# Altium PCB Copy of Power_meter.PCBDOC
Units mm, origin at the board's own origin, x right, y up, seen from the top; angles counter-clockwise.
Board outline 11.45 x 73.05 mm, 2 copper layers (Top, Bot), stack 1.571 mm thick; 56 components, 55 nets, 201 pads, 35 vias.
Unrouted connection lines stored in the file: 55.
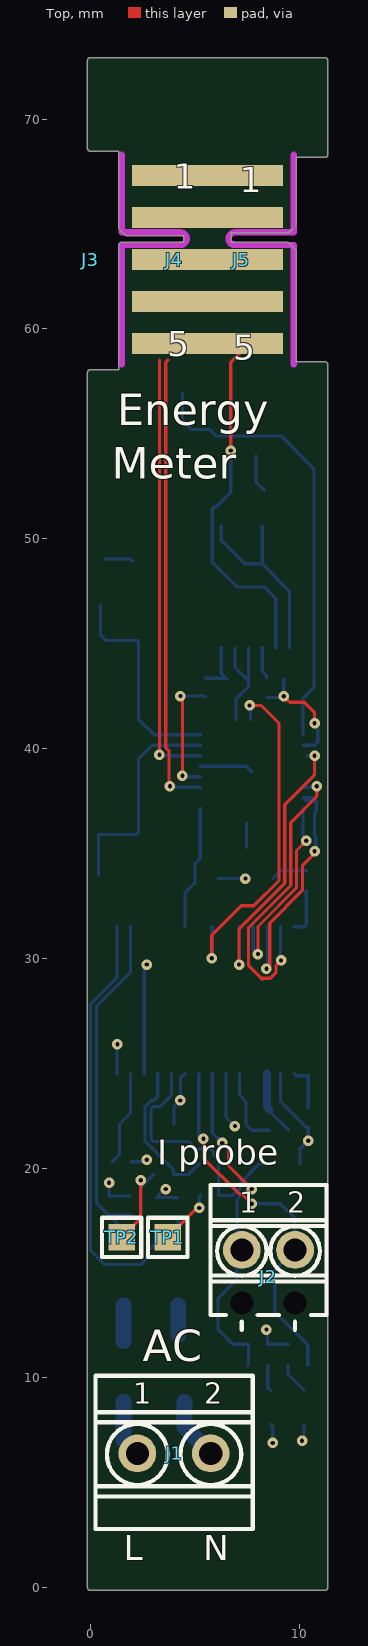
[diagram p0: Top view]
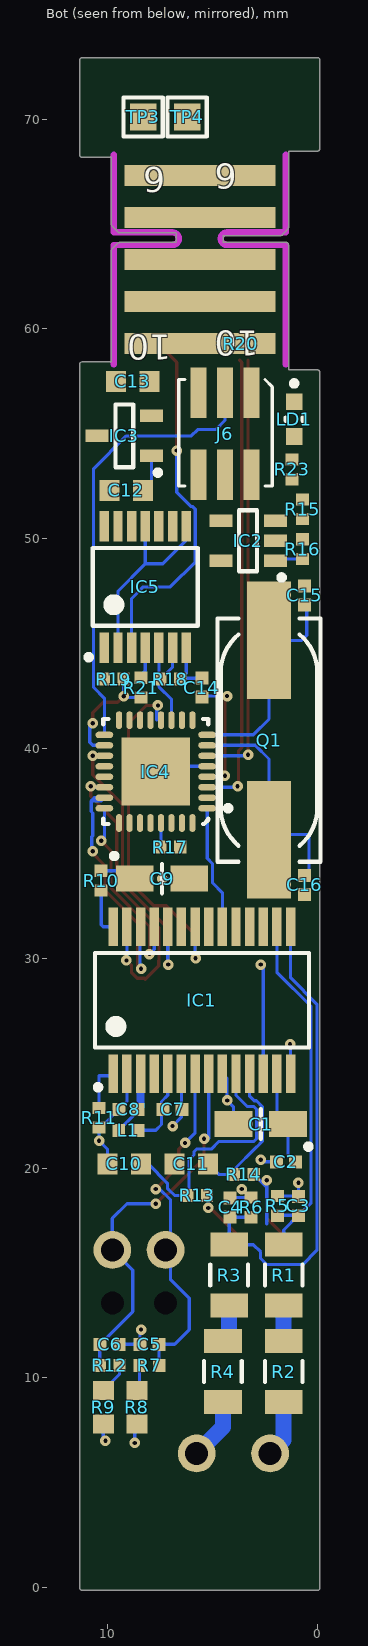
[diagram p1: Bot view, seen from below]

## Layer stack, top to bottom
TopSolder: solder mask 0.0102, Solder Resist, Dk 3.5
Top: signal copper 0.0356
Dielectric1: core 1.5, FR-4, Dk 4.8
Bot: signal copper 0.0356
BottomSolder: solder mask 0.0102, Solder Resist, Dk 3.5

## Board outline
-0.127,0 -0.127,57.917 cw(c0,57.917) 0,58.044 1.373,58.044 1.373,64 cw(c1.5,64) 1.5,64.127 4.473,64.127 4.473,64.445 1.747,64.445 cw(c1.747,64.573) 1.657,64.483 1.41,64.73 1.41,64.729 cw(c1.5,64.82) 1.373,64.82 1.373,68.473 0,68.473 cw(c0,68.6) -0.127,68.6 -0.127,72.8 cw(c0,72.8) 0,72.927 11.2,72.927 cw(c11.2,72.8) 11.327,72.8 11.327,68.3 cw(c11.2,68.3) 11.2,68.173 9.827,68.173 9.827,65 cw(c9.7,65) 9.79,64.909 9.79,64.91 9.49,64.61 9.491,64.61 cw(c9.4,64.7) 9.4,64.573 6.727,64.573 6.727,64.127 9.4,64.127 cw(c9.4,64) 9.491,64.09 9.49,64.09 9.691,63.89 ccw(c9.6,63.8) 9.69,63.89 ccw(c9.6,63.8) 9.69,63.891 9.691,63.89 9.79,63.79 9.79,63.791 cw(c9.7,63.7) 9.827,63.7 9.827,58.427 11.2,58.427 cw(c11.2,58.3) 11.327,58.3 11.327,0 cw(c11.2,0) 11.2,-0.127 0,-0.127 cw(c0,0)

## Design rules (kind name [scope] priority, off if disabled: settings)
Clearance Clearance_DIFF [(InDifferentialPairClass('All Differential Pairs'))] p1: gap=0.127 ignorepadtopadclearanceinfootprint=FALSE except(0: Arc-Hole Track-Hole SMDPad-Hole THPad-Hole Via-Hole Fill-Hole Poly-Hole Region-Hole Text-Hole; 0.254: Arc-Poly Track-Poly SMDPad-Poly THPad-Poly Via-Poly Fill-Poly Poly-Poly Poly-Region Poly-Text)
Clearance [All] p2: gap=0.127 ignorepadtopadclearanceinfootprint=FALSE except(0: Arc-Hole Track-Hole SMDPad-Hole THPad-Hole Via-Hole Fill-Hole Poly-Hole Region-Hole Text-Hole; 0.381: Arc-Poly Track-Poly SMDPad-Poly THPad-Poly Via-Poly Fill-Poly Poly-Poly)
DiffPairsRouting [All] p1: maxlimit=0.254 minlimit=0.127 mostfreqgap=0.127 toplayer_minwidth=0.127 toplayer_maxwidth=0.381 toplayer_prefwidth=0.254 bottomlayer_minwidth=0.127 bottomlayer_maxwidth=0.381 bottomlayer_prefwidth=0.254 maxuncoupledlength=12.7
FabricationTestPointUsage TestPointUsage [All] p1: valid=0 allowmultiple=FALSE
FabricationTestpoint Testpoint [All] p1: side=3 testpointundercomponent=TRUE minsize=1.016 maxsize=2.54 preferedsize=1.524 minholesize=0.508 maxholesize=1.016 preferedholesize=0.813 testpointgrid=0.025 allowsidetop=TRUE allowsidebottom=TRUE usegrid=TRUE gridtolerance=0
HoleSize [All] p1: absolutevalues=TRUE maxlimit=3.81 minlimit=0.025 maxpercent=80.000 minpercent=20.000
HoleToHoleClearance [All] p1: gap=0.025 allowstackedmicrovias=TRUE
MinimumSolderMaskSliver [All] p1: minsoldermaskwidth=0
PlaneClearance [All] p1: clearance=0.254
PlaneConnect [All] p1: planeconnectstyle=Direct reliefexpansion=0.508 reliefentries=4 reliefconductorwidth=0.254 reliefairgap=0.254
PolygonConnect PolygonConnect_pad [(InPadClass('All Pads'))] p1: connectstyle=Relief reliefconductorwidth=0.254 reliefentries=4 polygonreliefangle="90 Angle" airgapwidth=0.254
PolygonConnect [All] p2: connectstyle=Direct reliefconductorwidth=0.254 reliefentries=4 polygonreliefangle="45 Angle" airgapwidth=0.254
RoomDefinition Power_meter [InComponentClass('Power_meter')] p1 off: confinementstyle=ConfineIn formatcopy=TRUE lockcomponents=FALSE outline 20.15,26.65 202.899,26.65 202.899,50.4 20.15,50.4
RoutingVias [All] p1: holewidth=0.2 width=0.5 viastyle="Through Hole" minholewidth=0.2 minwidth=0.5 maxholewidth=0.711 maxwidth=1.27
SilkToSilkClearance [All] p1: silktosilkclearance=0
SilkToSolderMaskClearance SilkscreenOverComponentPads [IsPad] p1: minsilkscreentomaskgap=0 clearancetoexposedcopper=TRUE
SolderMaskExpansion [All] p1: expansion=0.051
Width [All] p1: maxlimit=1.27 minlimit=0.127 preferedwidth=0.127
20 further rules are at their usual default settings.

## Classes and differential pairs
component class Power_meter: C1 C2 C3 C4 C5 C6 C7 C8 C9 C10 C11 C14 C15 C16 IC1 IC2 IC3 IC5 IC8 IC9 IC10 IC11 J1 J2 J3 J4 J5 J6 L1 Q1 R1 R2 R3 R4 R5 R6 R7 R8 R9 R10 R11 R12 R13 R14 R18 R19 R20 R21 R24 TP1 TP2 TP3 TP4

## Components (designator, comment, footprint, x,y, rotation, side; value= is the part's Value field where it differs from the comment)
C1 "10uF" CAPMP3216X180N 2.7,22.1 r0 bottom
C2 "100nF" CAPC1005X55N 1.5,20.3 r180 bottom
C3 "33nF" CAPC1005X55N 0.9,18.2 r270 bottom
C4 "33nF" CAPC1005X55N 4.16,18.126 r270 bottom
C5 "33nF" CAPC1005X55N 8,11.6 r180 bottom
C6 "33nF" CAPC1005X55N 9.9,11.6 r180 bottom
C7 "100nF" CAPC1005X55N 6.9,22.8 r0 bottom
C8 "100nF" CAPC1005X55N 9,22.8 r0 bottom
C9 "10uF" CAPMP3216X180N 7.4,33.8 r180 bottom
C10 "330nF" CAPC1608X87N 9.2,20.2 r180 bottom
C11 "330nF" CAPC1608X87N 6,20.2 r0 bottom
C12 "1uF" CAPC1608X87N 9.1,52.3 r180 bottom
C13 "1uF" CAPC1608X87N 8.8,57.5 r180 bottom
C14 "100nF" CAPC1005X55N 5.5,42.9 r270 bottom
C15 "18pF" CAPC1005X55N 0.6,47.3 r270 bottom
C16 "18pF" CAPC1005X55N 0.6,33.5 r90 bottom
IC1 "ATM90E26-YU" SOP65P780X200-28N 5.5,28 r90 bottom
IC2 "24AA16T-I/OT" SOT95P280X145-5N 3.3,49.9 r0 bottom
IC3 "AP7313-33SAG-7" SOT95P285X140-3N 9.2,54.9 r0 bottom
IC4 "ATMEGA328PB-MU" QFN50P500X500X100-33N-S325 7.7,38.9 r0 bottom
IC5 "74HC4066PW" SOP65P640X110-14N 8.2,47.7 r90 bottom
J1 "=Family" PHOENIX_1751248 4,6.4 r0 top
J2 "=Family" PHOENIX_1725656 8.5,16.1 r0 top
J3 "=Family" "AVX_00 9159 010 061 916" 0,63.3 r180 top
J4 "=Family" EDGE10T1B6_P200W1000L0F100X400 4,67.3 r270 top locked
J5 "=Family" EDGE10T5B10_P200W1000L0F100X400 7.2,59.3 r90 top
J6 "ZL322-2X3P or PLHTD6S-TR-CV" ZL322-2X3P 4.4,55 r0 bottom
L1 "220R@100MHz" INDC1005X55N 9,21.8 r180 bottom
LD1 "Green" LED_KINGBRIGHT_KPH-1608CGCK 1.1,55.7 r270 bottom
Q1 "8.192MHz" XTAL_ABRACON_ABLS 2.3,40.4 r270 bottom
R1 "470k" RESC3216X65N 1.6,14.9 r270 bottom
R2 "470k" RESC3216X65N 1.6,10.3 r270 bottom
R3 "470k" RESC3216X65N 4.2,14.9 r270 bottom
R4 "470k" RESC3216X65N 4.5,10.3 r270 bottom
R5 "1k" RESC1005X40N 1.9,18.2 r270 bottom
R6 "1k" RESC1005X40N 3.16,18.126 r270 bottom
R7 "1k" RESC1005X40N 8,10.6 r0 bottom
R8 "2R4" RESC1608X55N 8.6,8.6 r90 bottom
R9 "2R4" RESC1608X55N 10.2,8.6 r270 bottom
R10 "0" RESC1005X40N 10.3,33.7 r90 bottom
R11 "0" RESC1005X40N 10.4,22.4 r270 bottom
R12 "1k" RESC1005X40N 9.9,10.6 r180 bottom
R13 "100" RESC1005X40N 5.73,18.7 r0 bottom
R14 "100" RESC1005X40N 3.5,19.7 r0 bottom
R15 "1k" RESC1005X40N 0.7,51.4 r270 bottom
R16 "1k" RESC1005X40N 0.7,49.5 r90 bottom
R17 "10k" RESC1005X40N 7,35.3 r0 bottom
R18 "100k" RESC1005X40N 7,43.3 r0 bottom
R19 "100k" RESC1005X40N 9.7,43.3 r0 bottom
R20 "100k" RESC1005X40N 3.65,59.3 r0 bottom
R21 "100k" RESC1005X40N 8.4,42.9 r90 bottom
R23 "10k" RESC1005X40N 1.2,53.3 r90 bottom
TP1 "Test Point" TPS127 3.7,16.7 r0 top
TP2 "Test Point" TPS127 1.5,16.7 r0 top
TP3 "Test Point" TPS127 8.3,70.1 r270 bottom
TP4 "Test Point" TPS127 6.2,70.1 r270 bottom

## Footprints (in the part's own frame and the unit in brackets; to place one, negate y for a bottom-side part, rotate by r counter-clockwise, add the part's x,y. Pads: shape width x height; smd on the part's side, far side on the other; paste and mask are expansions set on the pad)
"AVX_00 9159 010 061 916" [mm] "10 Contacts, 2mm Pitch, Open Ended Card Edge Connector, 9159 Series"
  body extent -5,-4.95 5,4.95, height 1.7
CAPC1005X55N [mm] "Chip Capacitor, Body 1.0x0.55mm, IPC Medium Density"
  rect 0.62x0.62 smd: 1(-0.45,0) 2(0.45,0)
  body extent -0.52,-0.27 0.53,0.28, height 0.55
CAPC1608X87N [mm] "Chip Capacitor, Body 1.6x0.8mm IPC Medium Density"
  rect 0.95x1 smd: 1(-0.8,0) 2(0.8,0)
  body extent -0.87,-0.47 0.88,0.48, height 0.87
CAPMP3216X180N [mm] "Capacitor, Polarized, Molded  Body 3.2x1.6mm, IPC Medium Density"
  rect 1.8x1.25 smd: 1(-1.3,0) 2(1.3,0)
  silkscreen extent -2.4,-0.7 0,1.2, body extent -1.7,-0.9 1.7,0.9, height 1.6
EDGE10T1B6_P200W1000L0F100X400 [mm] "10 contacts Board Edge Connector, First Left Top Pad 1, First Left Bottom Pad 2, Pitch 2mm, Length 0mm, Width 10mm, Finger Lenght 4mm, Finger Width 1mm"
  rect 1x4 smd paste-0.5: 1(0,0) 2(2,0) 3(4,0) 4(6,0) 5(8,0)
  rect 1x4 smd far side paste-0.5: 6(0,0) 7(2,0) 8(4,0) 9(6,0) 10(8,0)
  KeepOutLayer lines w0.3: 9,-2.5 3.3,-2.5 3.3,0.3 ccw(c3,0.3) 2.7,0.3 2.7,-2.5 -1,-2.5
EDGE10T5B10_P200W1000L0F100X400 [mm] "10 contacts Board Edge Connector, First Left Top Pad 5, First Left Bottom Pad 10, Pitch 2mm, Length 0mm, Width 10mm, Finger Lenght 4mm, Finger Width 1mm"
  rect 1x4 smd paste-0.5: 1(8,0) 2(6,0) 3(4,0) 4(2,0) 5(0,0)
  rect 1x4 smd far side paste-0.5: 6(8,0) 7(6,0) 8(4,0) 9(2,0) 10(0,0)
  KeepOutLayer lines w0.3: -1,-2.5 4.7,-2.5 4.7,0.3 cw(c5,0.3) 5.3,0.3 5.3,-2.5 9,-2.5
INDC1005X55N [mm] "Chip Inductor, 2-Leads, EIA 0402, Metric 1005, Body 1x0.5mm, 0402IPC Medium Density"
  rect 0.6x0.62 smd: 1(-0.46,0) 2(0.46,0)
  body extent -0.52,-0.27 0.53,0.28, height 0.55
LED_KINGBRIGHT_KPH-1608CGCK [mm] "SMT Green LED, Case 0603, Body L 1.6 x W 0.8mm H 0.65mm"
  rect 0.8x0.8 smd: 1(-0.825,0) 2(0.825,0)
  silkscreen extent -1.82,-0.4 0.08,0.4, body extent -0.8,-0.4 0.8,0.4, height 0.65
PHOENIX_1725656 [mm] "Micro PCB Terminal Block, Pitch 2.54mm, 2 Positions, Screw Connection"
  round 1.8 hole 1.1: 1(-1.27,0) 2(1.27,0)
  round 0.5 hole 1.1 unplated mask+0.3: 3(-1.27,-2.54) 4(1.27,-2.54)
  silkscreen extent -2.77,-3.81 2.77,3.1, body extent -2.77,-3.1 2.77,3.1, height 8.5
PHOENIX_1751248 [mm] "Terminal Block, 10A 160V, Pitch 3.5mm, 2 Positions, Screw Connection"
  round 1.8 hole 1.1: 1(-1.75,0) 2(1.75,0)
  silkscreen extent -3.75,-3.6 3.75,3.7, body extent -3.75,-3.6 3.75,3.7, height 8.5
QFN50P500X500X100-33N-S325 [mm] "QFN, (MO-220-VHHD-4) 0.50mm pitch,square; 8 pin X 8 pin, 5mm X 5mm X 1.00mm H body (w/thermal tab 3.25 X 3.25mm),  IPC Medium Density"
  oval 0.85x0.3 smd: 1(-2.45,1.75) 2(-2.45,1.25) 3(-2.45,0.75) 4(-2.45,0.25) 5(-2.45,-0.25) 6(-2.45,-0.75) 7(-2.45,-1.25) 8(-2.45,-1.75) 17(2.45,-1.75) 18(2.45,-1.25) 19(2.45,-0.75) 20(2.45,-0.25) 21(2.45,0.25) 22(2.45,0.75) 23(2.45,1.25) 24(2.45,1.75)
  oval 0.3x0.85 smd: 9(-1.75,-2.45) 10(-1.25,-2.45) 11(-0.75,-2.45) 12(-0.25,-2.45) 13(0.25,-2.45) 14(0.75,-2.45) 15(1.25,-2.45) 16(1.75,-2.45) 25(1.75,2.45) 26(1.25,2.45) 27(0.75,2.45) 28(0.25,2.45) 29(-0.25,2.45) 30(-0.75,2.45) 31(-1.25,2.45) 32(-1.75,2.45)
  rect 3.25x3.25 smd: 33(0,0)
  silkscreen extent -3.57,-2.5 2.5,2.5, body extent -2.5,-2.5 2.5,2.5, height 1
RESC1005X40N [mm] "Chip Resistor, EIA 0402, Metric 1005, Body 1.0x0.5mm, IPC Medium Density"
  rect 0.58x0.62 smd: 1(-0.47,0) 2(0.47,0)
  body extent -0.52,-0.27 0.53,0.28, height 0.4
RESC1608X55N [mm] "Chip Resistor, EIA 0603, Metric 1608, Body 1.6x0.8mm, IPC Medium Density"
  rect 0.9x1 smd: 1(-0.8,0) 2(0.8,0)
  body extent -0.87,-0.47 0.88,0.48, height 0.55
RESC3216X65N [mm] "Chip Resistor, EIA 1206, Metric 3216, Body 3.2x1.6mm, IPC Medium Density"
  rect 1.15x1.8 smd: 1(-1.45,0) 2(1.45,0)
  silkscreen extent -0.5,-0.9 0.5,0.9, body extent -1.67,-0.87 1.68,0.88, height 0.65
SOP65P640X110-14N [mm] "SOP, 14-Leads, Body 4.4x5mm (max), Pitch 0.65mm, IPC Medium Density"
  rect 1.45x0.45 smd: 1(-2.9,1.95) 2(-2.9,1.3) 3(-2.9,0.65) 4(-2.9,0) 5(-2.9,-0.65) 6(-2.9,-1.3) 7(-2.9,-1.95) 8(2.9,-1.95) 9(2.9,-1.3) 10(2.9,-0.65) 11(2.9,0) 12(2.9,0.65) 13(2.9,1.3) 14(2.9,1.95)
  silkscreen extent -3.47,-2.5 1.85,2.83, body extent -3.12,-2.55 3.12,2.55, height 1.1
SOP65P780X200-28N [mm] "SOP, 0.65mm Pitch; 28 Pin, 5.30mm W X 10.20mm L X 2.00mm H Body, IPC Medium Density"
  rect 1.85x0.45 smd: 1(-3.5,4.225) 2(-3.5,3.575) 3(-3.5,2.925) 4(-3.5,2.275) 5(-3.5,1.625) 6(-3.5,0.975) 7(-3.5,0.325) 8(-3.5,-0.325) 9(-3.5,-0.975) 10(-3.5,-1.625) 11(-3.5,-2.275) 12(-3.5,-2.925) 13(-3.5,-3.575) 14(-3.5,-4.225) 15(3.5,-4.225) 16(3.5,-3.575) 17(3.5,-2.925) 18(3.5,-2.275) 19(3.5,-1.625) 20(3.5,-0.975) 21(3.5,-0.325) 22(3.5,0.325) 23(3.5,0.975) 24(3.5,1.625) 25(3.5,2.275) 26(3.5,2.925) 27(3.5,3.575) 28(3.5,4.225)
  silkscreen extent -4.27,-5.1 2.25,5.1, body extent -4.11,-5.25 4.11,5.25, height 2
SOT95P280X145-5N [mm] "SOT, 0.95mm pitch; 5 pin, 1.60mm W X 2.90mm L X 1.45mm H body, IPC Medium Density"
  rect 1.1x0.6 smd: 1(-1.3,0.95) 2(-1.3,0) 3(-1.3,-0.95) 4(1.3,-0.95) 5(1.3,0.95)
  silkscreen extent -1.72,-1.45 0.43,1.87, body extent -1.4,-1.5 1.4,1.5, height 1.45
SOT95P285X140-3N [mm] "SOT23, 0.95mm Pitch; 3 Pin, 1.6mm W X 3mm L X 1.4mm H Body, IPC Medium Density"
  rect 1.1x0.6 smd: 1(-1.3,0.95) 2(-1.3,-0.95) 3(1.3,0)
  silkscreen extent -1.72,-1.5 0.43,1.87, body extent -1.4,-1.5 1.4,1.5, height 1.4
TPS127 [mm] "1.27 x  1.27mm SMD Test Point Area"
  rect 1.27x1.27 smd paste-1.27: 1(0,0)
  silkscreen extent -0.94,-0.94 0.94,0.94
XTAL_ABRACON_ABLS [mm] "HC/49US (AT49) SMD Cristal, Body 11.4x4.7mm, ABLS Serie"
  rect 5.6x2.1 smd: 1(-4.75,0) 2(4.75,0)
  silkscreen extent -5.8,-2.45 5.8,2.45, body extent -6.6,-2.45 6.6,2.45, height 4.2
ZL322-2X3P [mm] "SMT 1.27 mm dual goldpin"
  rect 0.76x2.4 smd: 1(-1.27,-1.95) 2(-1.27,1.95) 3(0,-1.95) 4(0,1.95) 5(1.27,-1.95) 6(1.27,1.95)
  silkscreen extent -2.25,-2.58 2.2,2.5, body extent -2.05,-2.15 2.03,2.15, height 4.5

## Part data
C1 C9: library part CTE3216-18_10UF_16V_20%_AVX_TCJ, "Polarised capacitor", Case=A, Manufacturer=AVX, Manufacturer Part Number=TCJA106M016R0200, Tolerance=±20%, Voltage=16V, Author="CERN DEM JLC", ComponentHeight=1.8mm, Component Type=Standard, CreateDate=29.03.2012, HelpURL=\\cern.ch\dfs\Applications\Altium\Datasheets\CTE_AVX_TCJ.pdf, LatestRevisionDate=29.03.2012, Mounted=Yes, Part Description="ESR 0R200 Tantalum Solid Electrolytic Chip Capacitor with Conductive Polymer Electrode", Part Number=CTE3216-18_10UF_16V_20%_AVX_TCJ, Pin Count=2, Sense=No, SMD=Yes, Socket=No, Status=Preferred
C2 C7 C8 C14: library part CC0402_100NF_16V_10%_X5R, "Non-polarised capacitor", Case=0402, Manufacturer=GENERIC, Manufacturer1 ComponentHeight=0.55mm, Manufacturer1 Example=MURATA, Manufacturer1 Part Number=GRM155R61C104KA88D, Tolerance=±10%, Voltage=16V, Author="CERN DEM JLC", Component Type=Standard, CreateDate=10.12.2013, HelpURL=\\cern.ch\dfs\Applications\Altium\Datasheets\CC0402_X5R_MURATA_GRM.pdf, LatestRevisionDate=10.12.2013, Manufacturer Part Number=CC0402_100NF_16V_10%_X5R, Mounted=Yes, Part Description="SMD Multilayer Chip Ceramic Capacitor", Part Number=CC0402_100NF_16V_10%_X5R, Pin Count=2, Sense=No, SMD=Yes, Socket=No, Status=None, TC=X5R
C3 C4 C5 C6: library part CC0402_33NF_16V_10%_X7R, "Non-polarised capacitor", Case=0402, Manufacturer=GENERIC, Manufacturer1 ComponentHeight=0.55mm, Manufacturer1 Example=PHYCOMP, Manufacturer1 Part Number=223878715643, Tolerance=±10%, Voltage=16V, Author="CERN DEM JLC", Component Type=Standard, CreateDate=03.12.2007, HelpURL=\\cern.ch\dfs\Applications\Altium\Datasheets\CC0402_X7R_PHYCOMP.pdf, LatestRevisionDate=03.12.2007, Manufacturer Part Number=CC0402_33NF_16V_10%_X7R, Mounted=Yes, Part Description="SMD Multilayer Chip Ceramic Capacitor", Part Number=CC0402_33NF_16V_10%_X7R, Pin Count=2, Sense=No, SMD=Yes, Socket=No, Status="Not Recommended", TC=X7R
C10 C11: library part CC0603_330NF_16V_10%_X5R, "Non-polarised capacitor", Case=0603, Manufacturer=GENERIC, Manufacturer1 ComponentHeight=0.87mm, Manufacturer1 Example=PHYCOMP, Manufacturer1 Part Number=223878613656, Tolerance=±10%, Voltage=16V, Author="CERN DEM JLC", Component Type=Standard, CreateDate=03.12.2007, HelpURL=\\cern.ch\dfs\Applications\Altium\Datasheets\CC0805_X5R_PHYCOMP_HC.pdf, LatestRevisionDate=03.12.2007, Manufacturer Part Number=CC0603_330NF_16V_10%_X5R, Mounted=Yes, Part Description="SMD Multilayer Chip Ceramic Capacitor", Part Number=CC0603_330NF_16V_10%_X5R, Pin Count=2, Sense=No, SMD=Yes, Socket=No, Status=Preferred, TC=X5R
C12 C13: library part CC0603_1UF_16V_10%_X7R, "Non-polarised capacitor", Case=0603, Manufacturer=GENERIC, Manufacturer1 ComponentHeight=0.9mm, Manufacturer1 Example="YAGEO PHYCOMP", Manufacturer1 Part Number=223878615663, Manufacturer Part Number=CC0603_1uF_16V_10%_X7R, Tolerance=±10%, Voltage=16V, Author="CERN DEM JLC", Component Type=Standard, CreateDate=03.12.2007, HelpURL=\\cern.ch\dfs\Applications\Altium\Datasheets\CC0603_X7R_PHYCOMP.pdf, LatestRevisionDate=17.04.2015, Mounted=Yes, Part Description="SMD Multilayer Chip Ceramic Capacitor", Part Number=CC0603_1UF_16V_10%_X7R, Pin Count=2, Sense=No, SMD=Yes, Socket=No, Status=None, TC=X7R
C15 C16: library part CC0402_18PF_50V_5%_C0G, "Non-polarised capacitor", Case=0402, Manufacturer=GENERIC, Manufacturer1 ComponentHeight=0.55mm, Manufacturer1 Example=KEMET, Manufacturer1 Part Number=C0402C180J5GACTU, Tolerance=±5%, Voltage=50V, Author="CERN DEM JLC", Component Type=Standard, CreateDate=04.10.2016, HelpURL="\\cern.ch\dfs\Applications\Altium\Datasheets\CC0805_C0G_KEMET_(Commercial Grade).pdf", LatestRevisionDate=04.10.2016, Manufacturer Part Number=CC0402_18PF_50V_5%_C0G, Mounted=Yes, Part Description="SMD Multilayer Chip Ceramic Capacitor", Part Number=CC0402_18PF_50V_5%_C0G, Pin Count=2, Sense=No, SMD=Yes, Socket=No, Status=Preferred, TC=C0G/NP0
IC1: "Single-Phase High-Performance Wide-Span, Energy Metering IC", Case=SSOP28, Manufacturer="MICROCHIP TECHNOLOGY", Author="CERN DEM MR", Bonding=No, ComponentHeight=2mm, Component Type=Standard, CreateDate=13.12.2017, Device=ATM90E26-YU, HelpURL=\\cern.ch\dfs\Applications\Altium\Datasheets\ATM90E26-YU.pdf, LatestRevisionDate=13.12.2017, Manufacturer Part Number=ATM90E26-YU, Mounted=Yes, PackageDescription="SOP, 0.65mm Pitch; 28 pin, 5.30mm W X 10.20mm L X 2.00mm H body, IPC Medium Density", Part Description="Single-Phase High-Performance Wide-Span, Energy Metering IC", Part Number=ATM90E26-YU, Pin Count=28, PressFit=No, Sense=No, SMD=Yes, Socket=No
IC2: "1.7V-5.5V, 2K I2C Serial EEPROM With EUI-48 Node Identity", Case=SOT23-5, Manufacturer="MICROCHIP TECHNOLOGY", Author=GK, Bonding=No, ComponentHeight=1.45mm, Component Type=Standard, CreateDate=31.03.2016, Device=24AA16T-I/OT, HelpURL=\\cern.ch\dfs\Applications\Altium\Datasheets\24AA02E48T-I-OT.pdf, LatestRevisionDate=31.03.2016, Manufacturer Part Number=24AA16T-I/OT, Mounted=Yes, PackageDescription="SOT, 0.95mm pitch; 5 pin, 1.60mm W X 2.90mm L X 1.45mm H body, IPC Medium Density", Part Description="1.7V-5.5V, 16K I2C Serial EEPROM", Part Number=24AA16T-I/OT, Pin Count=5, PressFit=No, Sense=No, SMD=Yes, Socket=No
IC3: "150mA, Low Quiescent Current, Fast Transient Low Dropout Linear Regulator", Case=SOT23, Manufacturer="DIODES INCORPORATED", Author=GK, Bonding=No, ComponentHeight=1.45mm, Component Type=Standard, CreateDate=10.07.2015, Device=AP7313-33SAG-7, HelpURL=\\cern.ch\dfs\Applications\Altium\Datasheets\AP133-WG-7.pdf, LatestRevisionDate=10.07.2015, Manufacturer Part Number=AP7313-33SAG-7, Mounted=Yes, PackageDescription="SOT23, 0.95mm pitch; 3 pin, 1.6mm W X 3.0mm L X 1.45mm H body, IPC Medium Density", Part Description="150mA, Low Quiescent Current, Fast Transient Low Dropout Linear Regulator", Part Number=AP7313-33SAG-7, Pin Count=5, PressFit=No, Sense=No, SMD=Yes, Socket=No
IC4: "8-bit AVR 20MHz Microcontroller With 32K Bytes In-System  Programmable  Flash", Case=QFN32, Manufacturer=ATMEL, Author=GK, Bonding=No, ComponentHeight=1mm, Component Type=Standard, CreateDate=2011-02-08, Device=ATMEGA328PB-MU, HelpURL=\\cern.ch\dfs\Applications\Altium\Datasheets\ATMEGA328P-MU.pdf, LatestRevisionDate=2014-07-02, Manufacturer Part Number=ATMEGA328PB-MU, Mounted=Yes, PackageDescription="QFN, (MO-220-VHHD-2) 0.50mm pitch,square; 8 pin X 8 pin, 5mm X 5mm X 1.00mm H body (w/thermal tab 3.25 X 3.25mm),  IPC Medium Density", Part Description="8-bit AVR Microcontroller, 32KB Flash, 1KB EEPROM, 2KB SRAM, 32-pin MLF, Industrial Grade (-40°C to 85°C)", Part Number=ATMEGA328PB-MU, Pin Count=33, PressFit=No, Sense=No, SMD=Yes, Socket=No
IC5: Case=TSSOP14, Manufacturer="NXP SEMICONDUCTORS", Author="CERN DEM JLC", Bonding=No, ComponentHeight=1.1mm, Component Type=Standard, CreateDate=19.11.2014, Device=74HC4066PW, HelpURL=\\cern.ch\dfs\Applications\Altium\Datasheets\74HC4066PW.pdf, LatestRevisionDate=19.11.2014, Manufacturer Part Number=74HC4066PW, Mounted=Yes, PackageDescription="SOP, 14-Leads, Body 4.4x5mm (max), Pitch 0.65mm, IPC Medium Density", Part Description="Quad Single-Pole Single-Throw Analog Switch", Part Number=74HC4066PW, Pin Count=14, PressFit=No, Sense=No, SMD=Yes, Socket=No
J1: library part PHOENIX_1751248, "Terminal Block, 2 Positions, Screw Connection", Manufacturer="PHOENIX CONTACT", Manufacturer Part Number="1751248 (MKDS 1/ 2-3,5)", Author="CERN DEM JLC", ComponentHeight=8.5mm, Component Type=Standard, CreateDate=03.11.2009, HelpURL=\\cern.ch\dfs\Applications\Altium\Datasheets\PHOENIX_1751248.pdf, LatestRevisionDate=26.04.2010, Mounted=Yes, Part Description="10A 160V, Terminal Block, Pitch 3.5mm, 2 Positions, Screw Connection", Part Number=PHOENIX_1751248, Pin Count=2, PressFit=No, Sense=No, SMD=No, Socket=No, Status=None
J2: library part PHOENIX_1725656, "Terminal Block, 2 Positions, Screw Connection", Manufacturer="PHOENIX CONTACT", Manufacturer Part Number="1725656 (MPT 0,5/2-2,54)", Author="CERN DEM JMW", ComponentHeight=8.5mm, Component Type=Standard, CreateDate=07.11.2008, HelpURL=\\cern.ch\dfs\Applications\Altium\Datasheets\PHOENIX_1725656.pdf, LatestRevisionDate=26.04.2010, Mounted=Yes, Part Description="6A, 63V, Terminal Block, Pitch 2.54mm, 2 Positions, Screw Connection", Part Number=PHOENIX_1725656, Pin Count=2, PressFit=No, Sense=No, SMD=No, Socket=No, Status=None
J3: library part "AVX_00 9159 010 061 916", "Open Ended Card Edge Connector, 9159 Series", Manufacturer=AVX, Manufacturer Part Number="00 9159 010 061 916", Author="CERN DEM MR", ComponentHeight=1.6mm, Component Type=Standard, CreateDate=13.02.2018, HelpURL="\\cern.ch\dfs\Applications\Altium\Datasheets\AVX_00 9159 010 061 916.pdf", LatestRevisionDate=13.02.2018, Mounted=Yes, Part Description="10 Contacts, 2mm Pitch, Open Ended Card Edge Connector, 9159 Series", Part Number="AVX_00 9159 010 061 916", Pin Count=10, PressFit=No, Sense=No, SMD=No, Socket=No, Status=None
J4: library part EDGE10T1B6_P200W1000L0F100X400, "PCB Edge Connector 10 (2x5)", Author="CERN DEM MR", ComponentHeight=0mm, Component Type="Standard (No BOM)", CreateDate=14.02.2018, HelpURL=\\cern.ch\dfs\Applications\Altium\Datasheets\EDGE10T1B6_P200W1000L0F100X400.pdf, LatestRevisionDate=14.02.2018, Mounted=No, Part Description="10 Contacts Board Edge Connector, Pitch 2mm, Length 0mm, Width 10mm, Finger Lenght 4mm, Finger Width 1mm", Part Number=EDGE10T1B6_P200W1000L0F100X400, Pin Count=10, PressFit=No, Sense=No, SMD=No, Socket=No, Status=None
J5: library part EDGE10T5B10_P200W1000L0F100X400, "PCB Edge Connector 10 (2x5)", Author="CERN DEM MR", ComponentHeight=0mm, Component Type="Standard (No BOM)", CreateDate=14.02.2018, HelpURL=\\cern.ch\dfs\Applications\Altium\Datasheets\EDGE10T5B10_P200W1000L0F100X400.pdf, LatestRevisionDate=14.02.2018, Mounted=No, Part Description="10 Contacts Board Edge Connector, Pitch 2mm, Length 0mm, Width 10mm, Finger Lenght 4mm, Finger Width 1mm", Part Number=EDGE10T5B10_P200W1000L0F100X400, Pin Count=10, PressFit=No, Sense=No, SMD=No, Socket=No, Status=None
J6: library part "CON_2x3 1.27 SMT Male", "1.27 mm dual row goldpin (Maritex)"
L1: library part IND0402_MURATA_BLM15HB221SN1, "Inductor", Case=0402, Manufacturer=MURATA, Manufacturer Part Number=BLM15HB221SN1, Power=250mA, Resistance=1R, Tolerance=±25%, Author="CERN DEM JLC", ComponentHeight=0.55mm, Component Type=Standard, CreateDate=23.06.2009, HelpURL=\\cern.ch\dfs\Applications\Altium\Datasheets\IND0402_MURATA_BLM15H.pdf, LatestRevisionDate=23.06.2009, Mounted=Yes, Part Description="SMD EMIFIL Suppression Chip Ferrite Bead", Part Number=IND0402_MURATA_BLM15HB221SN1, Pin Count=2, Sense=No, SMD=Yes, Socket=No, Status=None
LD1: library part LED_KINGBRIGHT_KPH-1608CGCK, "LED Green 1C 2A", Manufacturer=KINGBRIGHT, Manufacturer Part Number=KPH-1608CGCK, Author="CERN DEM JLC", Bonding=No, Color=Green, ComponentHeight=0.65mm, Component Type=Standard, CreateDate=03.07.2017, HelpURL=\\cern.ch\dfs\Applications\Altium\Datasheets\LED_KINGBRIGHT_KPH-1608CGCK.pdf, LatestRevisionDate=03.07.2017, Mounted=Yes, PackageDescription="SMT Green LED, Case 0603, Body L 1.6 x W 0.8mm H 0.65mm", Part Description="SMD Green LED, Case 1.6mmX0.8mm(0603), 0.65mm Thickness", Part Number=LED_KINGBRIGHT_KPH-1608CGCK, Pin Count=2, PressFit=No, Sense=No, SMD=Yes, Socket=No
Q1: library part XTAL_8.192MHZ_ABRACON_ABLS-8.192MHZ-B2-T, "Quartz Crystal", Manufacturer=ABRACON, Manufacturer Part Number=ABLS-8.192MHZ-B2-T, Author="CERN DEM MR", Bonding=No, ComponentHeight=4.2mm, Component Type=Standard, CreateDate=15.02.2018, HelpURL=\\cern.ch\dfs\Applications\Altium\Datasheets\XTAL_ABRACON_ABLS.pdf, LatestRevisionDate=15.02.2018, Mounted=Yes, PackageDescription="SMD Crystal, Body 11.40mm L X 4.70mm W X 4.20mm H, HC/49US (AT49) ALBS Series", Part Description="Tolerance: ± 20ppm, Stability: ± 50ppm, -20°C to +70°C, 18pF, 80 Ohms ESR, Low Profile Surface Mount Microprocessor Crystal, ABLS Series", Part Number=XTAL_8.192MHZ_ABRACON_ABLS-8.192MHZ-B2-T, Pin Count=2, PressFit=No, Sense=No, SMD=Yes, Socket=No
R1 R2 R3 R4: library part R1206_470K_1%_0.25W_100PPM, "Resistor - 1%", Case=1206, Manufacturer=GENERIC, Manufacturer1 ComponentHeight=0.65mm, Manufacturer1 Example="NIC COMPONENT", Manufacturer1 Part Number=NRC12F4703TRF, Power=0.25W, Tolerance=±1%, Author="CERN DEM JLC", Component Type=Standard, CreateDate=03.12.2007, HelpURL=\\cern.ch\dfs\Applications\Altium\Datasheets\R1206_NIC_NRC.pdf, LatestRevisionDate=13.03.2008, Manufacturer Part Number=R1206_470K_1%_0.25W_100PPM, Mounted=Yes, Part Description="General Purpose Thick Film Chip Resistor", Part Number=R1206_470K_1%_0.25W_100PPM, Pin Count=2, PressFit=No, Sense=No, SMD=Yes, Socket=No, Status=Preferred, TC=±100ppm/°C
R5 R6 R7 R12 R15 R16: library part R0402_1K_1%_0.0625W_100PPM, "Resistor - 1%", Case=0402, Manufacturer=GENERIC, Manufacturer1 ComponentHeight=0.4mm, Manufacturer1 Example="YAGEO PHYCOMP", Manufacturer1 Part Number=232270671002L, Power=0.0625W, Tolerance=±1%, Author="CERN DEM JLC", Component Type=Standard, CreateDate=03.12.2007, HelpURL=\\cern.ch\dfs\Applications\Altium\Datasheets\R0402_Phycomp_RC0402.pdf, LatestRevisionDate=17.10.2012, Manufacturer Part Number=R0402_1K_1%_0.0625W_100PPM, Mounted=Yes, Part Description="General Purpose Thick Film Chip Resistor", Part Number=R0402_1K_1%_0.0625W_100PPM, Pin Count=2, PressFit=No, Sense=No, SMD=Yes, Socket=No, Status="Not Recommended", TC=±100ppm/°C
R8 R9: library part R0603_2R4_1%_0.1W_200PPM, "Resistor - 1%", Case=0603, Manufacturer=GENERIC, Manufacturer1 ComponentHeight=0.65mm, Manufacturer1 Example="YAGEO PHYCOMP", Manufacturer1 Part Number="232270462408L or RC0603FR-072R4L", Power=0.1W, Tolerance=±1%, Author="CERN DEM JLC", Component Type=Standard, CreateDate=03.12.2007, HelpURL=\\cern.ch\dfs\Applications\Altium\Datasheets\R0603_Tyco_RN73.pdf, LatestRevisionDate=17.10.2012, Manufacturer Part Number=R0603_2R4_1%_0.1W_200PPM, Mounted=Yes, Part Description="General Purpose Thick Film Chip Resistor", Part Number=R0603_2R4_1%_0.1W_200PPM, Pin Count=2, PressFit=No, Sense=No, SMD=Yes, Socket=No, Status=Preferred, TC=±200ppm/°C
R10 R11: library part R0402_0R_JUMPER, "Resistor", Case=0402, Manufacturer=GENERIC, Manufacturer1 ComponentHeight=0.4mm, Manufacturer1 Example="YAGEO PHYCOMP", Manufacturer1 Part Number=232270591001L, Author="CERN DEM JLC", Component Type=Standard, CreateDate=03.12.2007, HelpURL=\\cern.ch\dfs\Applications\Altium\Datasheets\R0402_Phycomp_RC0402.pdf, LatestRevisionDate=17.10.2012, Manufacturer Part Number=R0402_0R_JUMPER, Mounted=Yes, Part Description="1A (0.05R Max DC Resistance) Zero Ohm Jumper", Part Number=R0402_0R_JUMPER, Pin Count=2, PressFit=No, Sense=No, SMD=Yes, Socket=No, Status="Not Recommended"
R13 R14: library part R0402_100R_1%_0.0625W_100PPM, "Resistor - 1%", Case=0402, Manufacturer=GENERIC, Manufacturer1 ComponentHeight=0.4mm, Manufacturer1 Example="YAGEO PHYCOMP", Manufacturer1 Part Number=232270671001L, Power=0.0625W, Tolerance=±1%, Author="CERN DEM JLC", Component Type=Standard, CreateDate=03.12.2007, HelpURL=\\cern.ch\dfs\Applications\Altium\Datasheets\R0402_Phycomp_RC0402.pdf, LatestRevisionDate=17.10.2012, Manufacturer Part Number=R0402_100R_1%_0.0625W_100PPM, Mounted=Yes, Part Description="General Purpose Thick Film Chip Resistor", Part Number=R0402_100R_1%_0.0625W_100PPM, Pin Count=2, PressFit=No, Sense=No, SMD=Yes, Socket=No, Status="Not Recommended", TC=±100ppm/°C
R17 R23: library part R0402_10K_1%_0.0625W_100PPM, "Resistor - 1%", Case=0402, Manufacturer=GENERIC, Manufacturer1 ComponentHeight=0.4mm, Manufacturer1 Example="YAGEO PHYCOMP", Manufacturer1 Part Number=232270671003L, Power=0.0625W, Tolerance=±1%, Author="CERN DEM JLC", Component Type=Standard, CreateDate=03.12.2007, HelpURL=\\cern.ch\dfs\Applications\Altium\Datasheets\R0402_Phycomp_RC0402.pdf, LatestRevisionDate=17.10.2012, Manufacturer Part Number=R0402_10K_1%_0.0625W_100PPM, Mounted=Yes, Part Description="General Purpose Thick Film Chip Resistor", Part Number=R0402_10K_1%_0.0625W_100PPM, Pin Count=2, PressFit=No, Sense=No, SMD=Yes, Socket=No, Status="Not Recommended", TC=±100ppm/°C
R18 R19 R20 R21: library part R0402_100K_1%_0.0625W_100PPM, "Resistor - 1%", Case=0402, Manufacturer=GENERIC, Manufacturer1 ComponentHeight=0.4mm, Manufacturer1 Example="YAGEO PHYCOMP", Manufacturer1 Part Number=232270671004L, Power=0.0625W, Tolerance=±1%, Author="CERN DEM JLC", Component Type=Standard, CreateDate=03.12.2007, HelpURL=\\cern.ch\dfs\Applications\Altium\Datasheets\R0402_Phycomp_RC0402.pdf, LatestRevisionDate=17.10.2012, Manufacturer Part Number=R0402_100K_1%_0.0625W_100PPM, Mounted=Yes, Part Description="General Purpose Thick Film Chip Resistor", Part Number=R0402_100K_1%_0.0625W_100PPM, Pin Count=2, PressFit=No, Sense=No, SMD=Yes, Socket=No, Status="Not Recommended", TC=±100ppm/°C
TP1 TP2 TP3 TP4: library part SMD_PAD_1.27X1.27MM, Author="CERN DEM JLC", ComponentHeight=0mm, Component Type="Standard (No BOM)", CreateDate=12.01.2008, Family="Test Point", HelpURL=Undefined, LatestRevisionDate=12.01.2008, Mounted=No, PackageDescription="1.27mm x 1.27mm PCB Copper Area (SMD Test Point)", Part Description="1.27mm x 1.27mm PCB Copper Area (SMD Test Point)", Part Number=SMD_PAD_1.27X1.27MM, Pin Count=1, Sense=No, SMD=Yes, Socket=No, Status=None

## Via types
v1: diameter 0.5, hole 0.2, Top to Bot, 35 vias

## Nets (pads, with @x,y where several pads share a name; then routed paths per layer and width w, separated by ;. In a path a pad name is that pad's centre, name@x,y a point inside that pad or via, vN(x,y) a via of type N, cw(c..) or ccw(c..) an arc to the next point about the centre after c; other vN are vias at no path point)
CLK_8.192: IC1.22 IC4.12 | length 16.9
  Top w0.152: v1(5.8,30) 5.8,31.1 7.2,32.5 7.8,32.5 9,33.7 9,41.2 8.15,42.05 v1(7.6,42.05)
  Bot w0.152: v1(5.8,30) 5.825,30.025 IC1.22 ; v1(7.6,42.05) 7.65,42 7.65,41.35
CS: IC1.24 IC4.19 | length 13.6
  Top w0.152: v1(7.1,29.7) 7.1,31.405 9.279,33.584 9.279,37.32 10.7,38.741 v1(10.7,39.65)
  Bot w0.152: v1(7.1,29.7) 7.125,29.725 IC1.24 ; IC4.19@10.35,39.65 v1(10.7,39.65)
GND: C1.2 C2.1 C3.1 C4.1 C5.1 C6.2 C7.1 C8.2 C9.2 C10.1 C11.2 C12.1 C13.1 C14.1 C15.1 C16.1 IC1.2 IC1.6 IC1.9 IC1.14 IC2.2 IC2.5 IC3.3 IC4.5 IC4.21 IC4.33 IC5.7 J4.9 J5.9 J6.6 LD1.1 R5.1 R6.1 R8.1 R9.2 R11.2 R18.1 R20.1 TP4.1 | length 25.9
  Top w0.152: v1(3.6,19) 3.636,19.036 v1@3.7,19.036
  Bot w0.152: v1(0.9,19.3) C3.1 0.92,18.67 R5.1 ; IC1.14 1.275,25.875 v1(1.3,25.9) ; C2.1 2.6,20.3 v1(2.7,20.4) ; v1(3.6,19) 3.564,19 R6.1 4.14,18.596 C4.1 ; C1.2 4,22.931 v1(4.294,23.225) 4.303,23.235 4.303,24.278 IC1.9 ; IC4.5 7.45,39.15 IC4.33 ; C14.1 6.38,43.35 R18.1@6.43,43.4 ; C9.2 v1(7.4,33.8) ; IC5.7 6.25,43.58 R18.1@6.43,43.4 ; IC1.6 6.475,22.425 v1(6.9,22) ; R18.1 R18.1@6.43,43.4 ; v1(8.4,12.3) 8.45,12.25 C5.1 C6.2 ; R8.1 8.7,7.7 v1(8.7,6.9) ; IC1.2 9.075,23.175 C8.2 10.32,21.93 R11.2 v1(10.4,21.3) 10,20.9 C10.1 ; v1(10.1,7) 10.2,7.1 R9.2
I1N: C10.2 IC1.10 R13.2 | length 12.2
  Bot w0.152: IC1.10 3.875,23.475 3.328,22.928 3.016,22.928 2.897,22.809 2.897,21.391 3.016,21.272 4.687,21.272 5.056,20.903 5.759,20.903 5.878,20.784 5.878,20.622 6.122,20.378 6.122,18.7 R13.2 6.805,18.7 7.147,19.042 7.147,19.284 8.062,20.2 C10.2
I1N_IN: R13.1 TP1.1 | length 2.7
  Top w0.152: TP1.1 5.1,18.1 v1(5.2,18.1)
  Bot w0.152: v1(5.2,18.1) 5.2,18.64 R13.1
I1P: C11.1 IC1.11 R14.2 | length 7.1
  Bot w0.152: IC1.11 3.225,23.42 3.012,23.208 2.9,23.208 2.617,22.925 2.617,21.275 2.9,20.992 2.908,20.992 3.97,19.93 R14.2 4.7,19.7 C11.1
I1P_IN: R14.1 TP2.1 | length 6.1
  Top w0.152: TP2.1 2.413,17.613 v1(2.413,19.423)
  Bot w0.152: 2.413,17.343 2.413,19.083 ; v1(2.413,19.423) 2.413,19.083 ; R14.1 2.413,19.083
I2N: C6.1 IC1.8 J2.2 R12.1 | length 17.9
  Top w0.152: v1(5.4,21.4) 5.4,20.47 7.1,18.77 7.23,18.77 v1(7.7,18.3)
  Bot w0.152: IC1.8 5.175,21.425 5.2,21.4 v1(5.4,21.4) ; v1(7.7,18.3) 9.07,18.3 9.77,17.6 J2.2 8.8,15.13 8.8,13.157 10.37,11.587 R12.1
I2N_IN: R9.1 R12.2 | length 1.5
  Bot w0.152: R12.2 9.43,10.17 R9.1
I2P: C5.2 IC1.7 J2.1 R7.1 | length 16.5
  Top w0.152: v1(6.3,21.2) 6.6,20.9 6.6,20.1 v1(7.7,19)
  Bot w0.152: IC1.7 5.825,21.675 v1(6.3,21.2) ; R7.1 7.55,10.62 C5.2 6.8,11.6 6.1,12.3 6.1,13.8 7,14.7 7,18.5 7.5,19 v1(7.7,19)
I2P_IN: R7.2 R8.2 | length 1.3
  Bot w0.152: R7.2 8.47,9.53 R8.2
IO0: IC4.14 J4.8 J5.8
IO1: IC4.13 J4.10 J5.10
IRQ: IC1.20 IC4.1 | length 6
  Bot w0.152: IC1.20 4.525,33.125 4.997,33.597 4.997,34.509 5.25,34.762 IC4.1
NetC7_2: C7.2 IC1.5 L1.2 | length 3.8
  Bot w0.152: IC1.5 7.125,23.475 7.425,23.175 7.425,22.075 7.7,21.8 L1.2
NetC15_2: C15.2 IC4.8 Q1.1 | length 10.4
  Bot w0.152: C15.2@0.5,46.85 0.5,45.4 0.75,45.15 Q1.1 2.3,41.4 3.05,40.65 IC4.8
NetC16_2: C16.2 IC4.7 Q1.2 | length 10.6
  Bot w0.152: C16.2@0.4,33.95 0.4,35.9 2.2,35.9 2.3,36 2.3,39.5 2.953,40.153 5.247,40.153 IC4.7
NetC17_1: IC4.20
NetIC1_1: IC1.1 R11.1 | length 2.2
  Bot w0.152: IC1.1 9.825,24.4 10.4,24.4 R11.1
NetIC1_28: IC1.28 R10.1 | length 2.2
  Bot w0.152: IC1.28 10.2,31.5 10.3,31.6 R10.1
NetIC4_32: IC4.32 R23.1
NetIC5_2: IC5.2 IC5.8 IC5.11 J4.3 | length 9.4
  Bot w0.152: IC5.8 6.25,49.917 7.367,48.8 8.2,48.8 ; IC5.11 8.2,48.8 ; IC5.2 9.5,47.5 8.2,48.8
NetIC5_3: IC5.3 J5.5 | length 17.1
  Top w0.152: v1(6.7,54.2) 6.7,58.4 7.2,58.9 J5.5
  Bot w0.152: v1(6.7,54.2) 6.7,52.213 6.016,51.528 5.941,51.528 5.822,51.409 5.822,48.878 7,47.7 8.3,47.7 8.85,47.15 IC5.3
NetIC5_9: IC5.9 IC5.10 J5.3
NetJ1_1: J1.1 R2.2 | length 2.7
  Bot w0.762: R2.2 1.6,7.05 J1.1
NetJ1_2: J1.2 R4.2 | length 3
  Bot w0.762: R4.2 4.5,7.65 J1.2
NetJ4_7: J4.7 J5.7
NetLD1_2: LD1.2 R23.2
NetLD2_2: 
NetR1_2: R1.2 R2.1 | length 1.7
  Bot w0.762: R2.1 R1.2
NetR3_2: R3.2 R4.1 | length 1.4
  Bot w0.762: R4.1@4.2,12.05 R3.2
OUT_EN: IC4.26 IC5.13 R20.2
P3V3: C8.1 C9.1 C13.2 C14.2 IC1.3 IC2.4 IC3.2 IC4.4 IC4.18 IC5.14 J6.2 L1.1 R10.2 R15.2 R16.2 R19.1 R21.1 TP3.1 | length 16.6
  Top w0.152: v1(4.3,42.5) 4.4,42.4 v1(4.4,38.7) ; v1(9.23,42.49) 9.52,42.2 10.2,42.2 10.7,41.7 v1(10.7,41.2)
  Bot w0.152: v1(4.3,42.5) 5.45,42.5 C14.2 ; v1(4.4,38.7) 4.45,38.65 IC4.4 ; R21.1 9.17,42.43 v1(9.23,42.49) R19.1 ; C8.1 8.55,22.71 L1.1 ; C9.1 C9.1@9.07,34.17 ; C9.1@9.125,34.225 C9.1@9.07,34.17 ; IC4.18 10.703,40.15 10.85,40.297 10.85,41.05 v1(10.7,41.2) ; R10.2 C9.1@9.07,34.17
  Bot w0.381: IC1.3 8.425,22.925 C8.1
P5V0: C12.2 IC3.1 J4.1 J5.1 R17.1 | length 1.8
  Bot w0.152: IC3.1 7.9,52.7 C12.2
P12V0: J4.2 J5.2
PROG_MISO: IC4.16 J6.1
PROG_MOSI: IC4.15 J6.4
PROG_SCK: IC4.17 J6.3 | length 21.4
  Bot w0.152: J6.3 4.4,55.635 4.835,55.2 5.7,55.2 6,54.9 9.1,54.9 10.663,53.337 10.663,42.906 10.15,42.393 IC4.17
RESETn: IC1.4 IC4.29 J6.5 R17.2 | length 1.2
  Bot w0.152: IC4.29 7.45,35.32 R17.2
RxD: IC4.30 IC5.4 J4.5 R21.2 | length 1.5
  Bot w0.152: IC5.4 8.2,43.7 8.4,43.5 R21.2
SCL: IC4.6 J4.6 | length 20.8
  Top w0.152: v1(3.3,39.7) 3.3,58.5
  Bot w0.152: v1(3.3,39.7) 3.35,39.65 IC4.6
SCL1: IC2.1 IC4.28 R16.1 | length 1.3
  Bot w0.152: R16.1 1.92,49.03 IC2.1
SCL/Rx: J5.6
SCLK: IC1.25 IC4.24 | length 9.4
  Top w0.152: v1(8,30.2) 8,31.515 9.838,33.353 9.838,35.138 v1(10.3,35.6)
  Bot w0.152: IC1.25 7.775,30.425 v1(8,30.2) ; IC4.24 10.15,35.75 v1(10.3,35.6)
SDA: IC4.3 J4.4 | length 21.9
  Top w0.152: 3.7,58.5 3.6,58.4 3.6,40.041 3.753,39.888 3.753,38.247 v1(3.8,38.2)
  Bot w0.152: v1(3.8,38.2) 3.85,38.15 IC4.3
SDA1: IC2.3 IC4.27 R15.1
SDA/Tx: J5.4
SI/RX: IC1.27 IC4.22 | length 14.6
  Top w0.152: v1(9.1,29.9) 8.853,29.653 8.853,29.312 8.588,29.047 8.247,29.047 8.2,29 7.553,29.647 7.553,29.888 7.547,29.894 7.547,31.457 9.559,33.469 9.559,36.469 10.8,37.71 v1(10.8,38.2)
  Bot w0.152: IC1.27 9.075,29.925 v1(9.1,29.9) ; IC4.22 10.7,38.15 10.7,38.2 v1(10.8,38.2)
SLAVE_EN: IC4.11 IC5.5 IC5.6 IC5.12 R18.2 | length 5.4
  Bot w0.152: IC5.6 6.9,43.87 R18.2 ; IC4.11 6.95,42.35 7.55,42.95 IC5.5
SO/TX: IC1.26 IC4.23 | length 12.8
  Top w0.152: v1(8.4,29.5) 8.559,29.659 8.559,31.678 10.118,33.237 10.118,34.418 v1@10.8,35.1 ; v1(10.7,35.1) v1@10.8,35.1 ; v1@10.85,35.15 v1@10.8,35.1
  Bot w0.152: v1(8.4,29.5) 8.453,29.553 8.453,31.472 IC1.26 ; v1(10.7,35.1) 10.6,35.1 10.753,35.253 10.753,35.788 10.7,35.841 10.7,36.926 10.778,37.004 10.778,37.503 ; 10.778,37.503 10.631,37.65 IC4.23 10.297,37.503 10.778,37.503
TxD: IC4.31 IC5.1 R19.2
USEL: IC1.12 IC4.9 | length 5.3
  Bot w0.152: IC1.12 2.575,29.575 v1(2.7,29.7)
VN: C4.2 IC1.15 R3.1 R6.2 | length 23.3
  Bot w0.152: IC1.15 1.275,29.075 0.017,27.817 0.017,16.083 0.7,15.4 2.412,15.4 2.703,15.691 2.703,16.003 3.05,16.35 R3.1 4.2,17.636 C4.2 4.14,17.656 R6.2
VP: C3.2 IC1.16 R1.1 R5.2 | length 17.4
  Bot w0.152: R1.1 1.6,17.05 C3.2 ; IC1.16 1.925,29.33 0.297,27.702 0.297,18.346 0.893,17.75 C3.2 ; R5.2@1.95,17.75 C3.2
VREF: C1.1 C2.2 IC1.13 | length 4.6
  Bot w0.152: C2.2 1.4,20.65 C1.1 1.925,22.625 IC1.13
pads on no net: IC1.17 IC1.18 IC1.19 IC1.21 IC1.23 IC4.2 IC4.10 IC4.25 J2.3 J2.4

## Silkscreen, mask and mechanical layers (free items; w line width, h text height)
TopOverlay:
  text "Energy" at 1.3,55.4 h1.5
  text "Meter" at 1.035,52.85 h1.5
  text "I probe" at 3.2,20.16 h1.2
  text "AC" at 2.5,10.8 h1.5
  text "L" at 1.6,1.3 h1.2
  text "N" at 5.4,1.3 h1.2
Mechanical1:
  lines w0.254: 10.9,58.3 9.7,58.3 ; 10.9,68.3 9.7,68.3 ; 9.7,58.3 9.7,63.7 9.6,63.8 9.4,64 6.6,64 6.6,64.7 9.4,64.7 9.7,65 9.7,68.3 ; 9.7,58.3 11.2,58.3 11.2,1.5 11.2,0 0,0 0,57.917 1.5,57.917 1.5,64 4.6,64 4.6,64.3 4.6,64.6 1.72,64.6 1.5,64.82 1.5,68.6 0,68.6 0,72.8 11.2,72.8 11.2,68.3 ; 9.7,68.3 11.2,68.3 ; 9.7,68.3 11.2,68.3 ; 9.7,68.3 11.2,68.3

## Text inside footprints (layer, text, board x,y; h text height)
J1: TopOverlay "1" at 2.05,8.775 h1; TopOverlay "2" at 5.45,8.775 h1
J2: TopOverlay "1" at 7.103,17.878 h1; TopOverlay "2" at 9.389,17.878 h1
J4: TopOverlay "5" at 6.825,58.52 h1.2; TopOverlay "1" at 7.125,66.5 h1.2; BottomOverlay "10" at 6.95,59.72 h1.2 r180; BottomOverlay "6" at 7.25,67.7 h1.2 r180
J5: TopOverlay "1" at 3.975,66.68 h1.2; TopOverlay "5" at 3.675,58.7 h1.2; BottomOverlay "6" at 3.85,67.88 h1.2 r180; BottomOverlay "10" at 2.8,59.9 h1.2 r180